# Altium PCB MB1075.PcbDoc (part 4 of 4)
Units mm, origin at the board's own origin, x right, y up, seen from the top; angles counter-clockwise.
Board outline 66 x 119.3 mm, 4 copper layers (TOP, L2, L3, Bottom), stack 1.548 mm thick; 196 components, 219 nets, 897 pads, 500 vias.
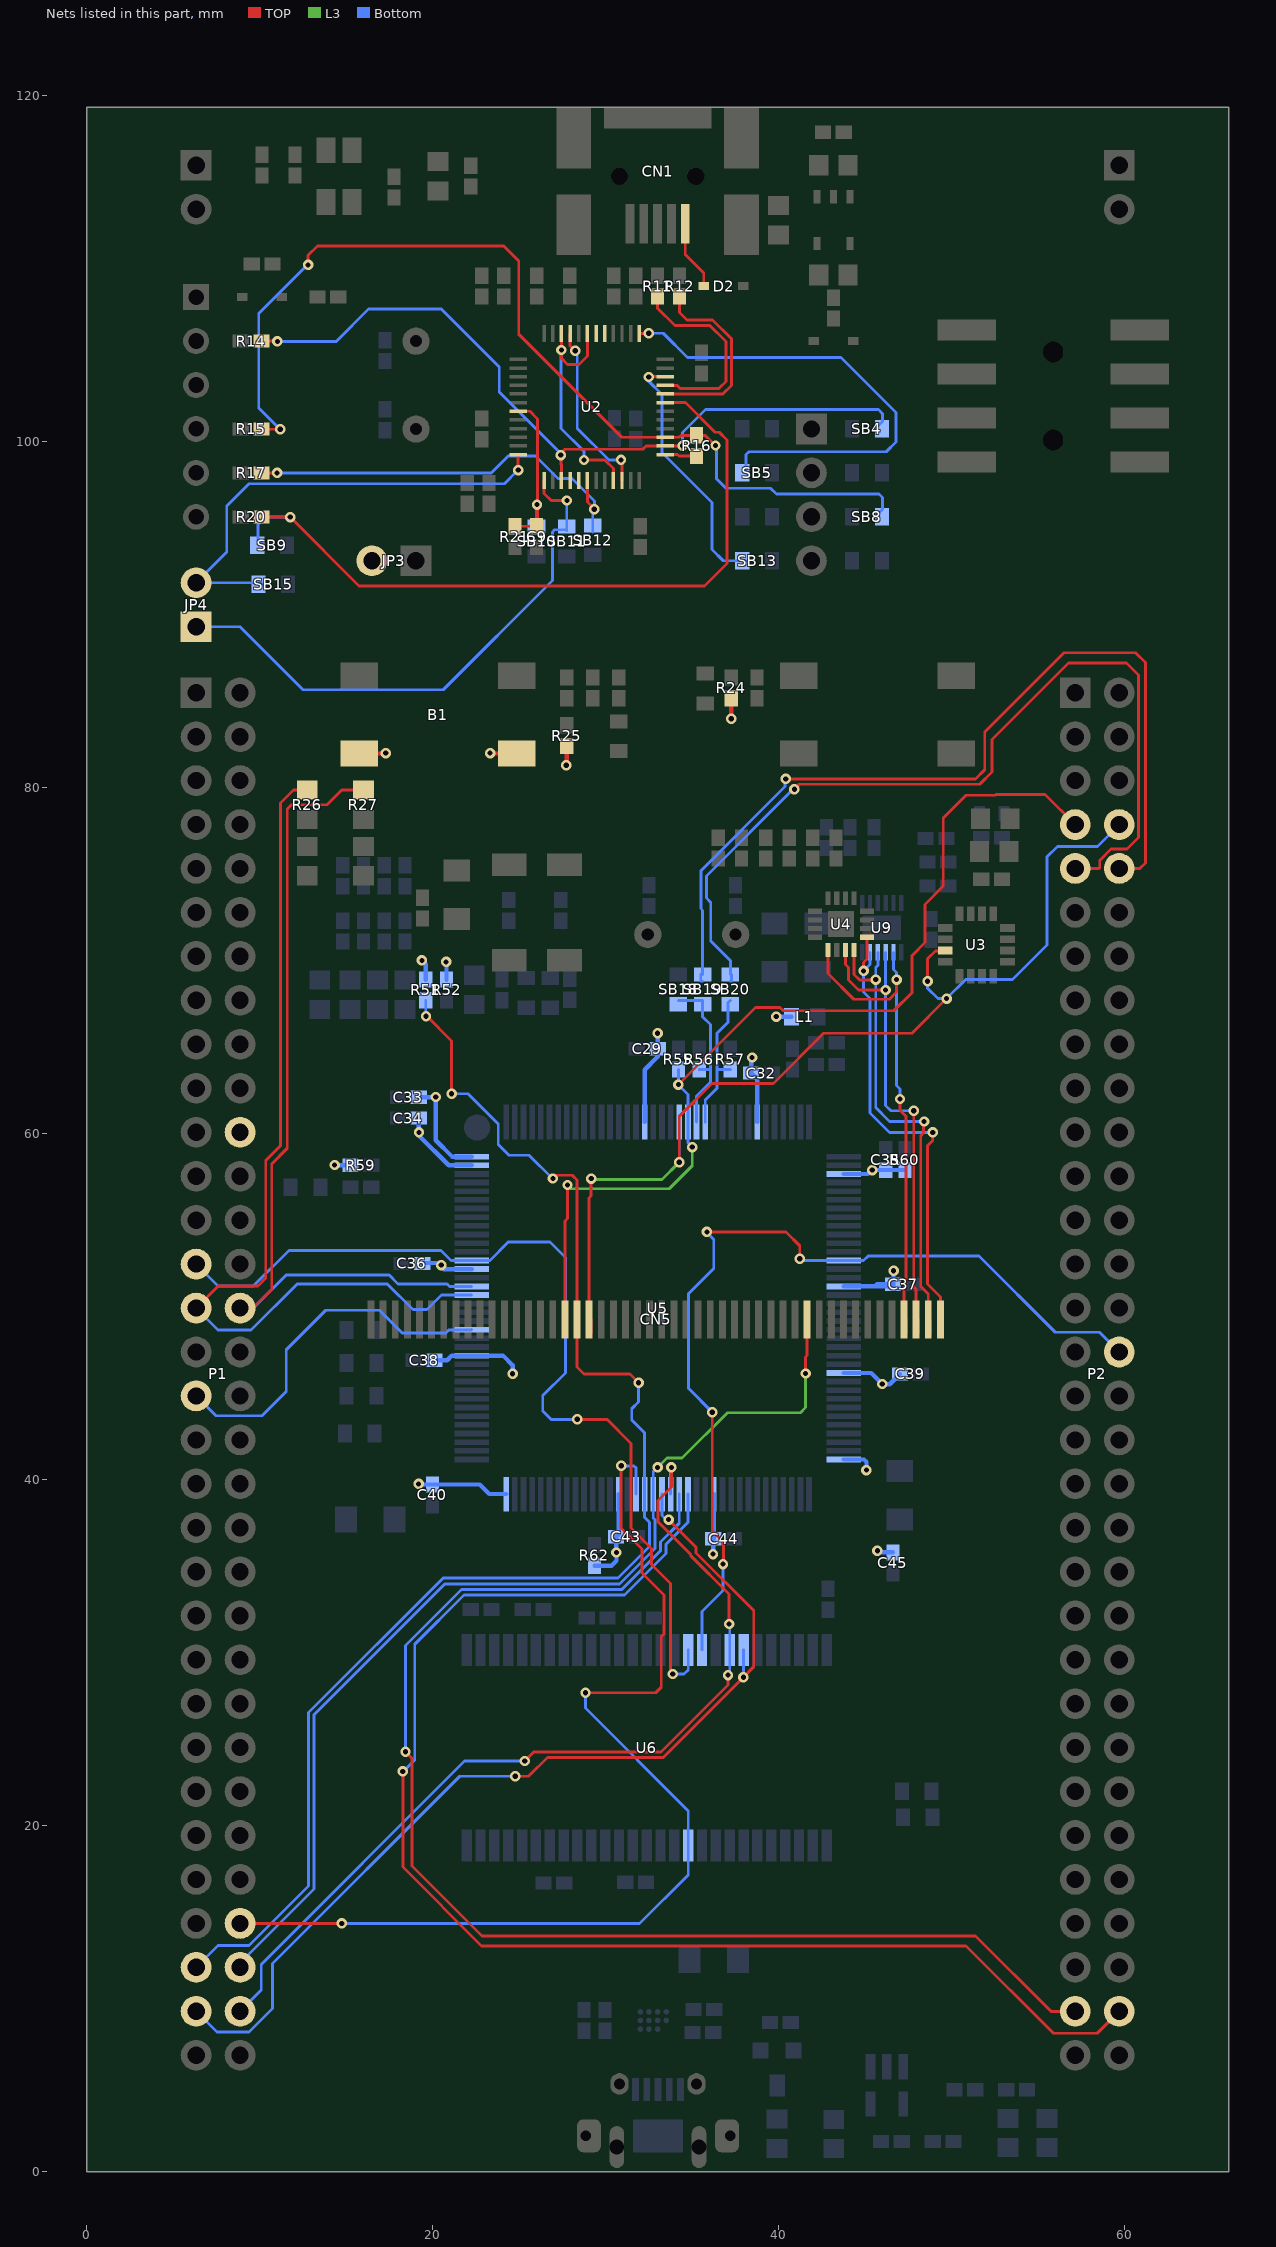
[diagram p5: the nets of this part, all layers, seen from the top]

## Via types
v1: diameter 0.6, hole 0.3, TOP to Bottom, 375 vias
v2: diameter 0.6, hole 0.3, TOP to Bottom, tented both sides, 125 vias

## Nets (pads, with @x,y where several pads share a name; then routed paths per layer and width w, separated by ;. In a path a pad name is that pad's centre, name@x,y a point inside that pad or via, vN(x,y) a via of type N, cw(c..) or ccw(c..) an arc to the next point about the centre after c; other vN are vias at no path point) (continued)
PF9: CN5.30 P2.8 U3.3 U5.21 | length 59.2
  TOP w0.165: CN5.30@29.039,49.256 29.039,56.269 29.158,56.388 v1(29.158,57.4) ; CN5.30@29.15,48.43 29.158,48.43 CN5.30@29.158,49.256 ; v1(34.252,58.346) 34.252,61.002 36.15,62.9 39.687,62.9 42.587,65.8 47.7,65.8 v1(49.7,67.8) ; v1(48.6,68.8) 48.6,70.1 49.05,70.55 U3.3@49.615,70.55
  L3 w0.165: v1(29.158,57.4) 29.158,57.354 33.26,57.354 v1(34.252,58.346)
  Bottom w0.165: U5.21@34.25,60.67 34.25,58.346 v1(34.252,58.346) ; v1(48.6,68.8) 48.6,68.4 49.2,67.8 v1(49.7,67.8) 50.8,68.9 53.5,68.9 55.5,70.9 55.5,76 56.1,76.6 58.41,76.6 P2.8@59.67,77.86
PF10: CN5.32 P2.7 R55.1 U5.22 | length 58.7
  TOP w0.165: CN5.32@27.639,49.256 27.639,54.939 27.793,55.093 v1(27.793,57.032) ; 35.3,63.933 v1(34.2,62.833) 38.66,67.293 40.078,67.293 40.271,67.1 46.646,67.1 47.708,68.162 47.708,70.297 48.448,71.036 48.448,73.248 49.5,74.3 49.5,78.245 50.81,79.555 52.5,79.555 52.546,79.6 55.39,79.6 P2.7@57.13,77.86
  L3 w0.165: v1(27.793,57.032) 28.011,56.814 33.674,56.814 35.001,58.141 v1(35.001,59.219)
  Bottom w0.165: R55.1@34.2,63.7 v1(34.2,62.833) 34.2,62.817 34.75,62.267 U5.22@34.75,60.67 34.75,59.47 v1(35.001,59.219)
PF11: P2.32 U5.49 U6.18 | length 54
  TOP w0.165: v1(35.845,54.323) 40.408,54.323 41.211,53.52 v1(41.211,52.769) ; v1(36.154,43.902) 36.154,37.053 36.807,36.4 36.807,35.296 36.982,35.121 v1(36.779,35.121)
  Bottom w0.165: U6.18@35.565,30.17 35.565,32.382 36.779,33.596 v1(36.779,35.121) ; v1(35.845,54.323) 35.845,54.277 36.239,53.883 36.239,52.214 34.775,50.75 34.775,45.281 v1(36.154,43.902) ; v1(41.211,52.769) 41.211,52.67 U5.49@43.75,52.67 44.902,52.67 45.168,52.936 51.566,52.936 55.979,48.523 58.527,48.523 P2.32@59.67,47.38
PG2: P2.62 U5.87 | length 79.7
  TOP w0.165: v1(18.276,23.147) 18.276,17.611 22.83,13.057 50.824,13.057 55.871,8.01 58.4,8.01 P2.62@59.67,9.28
  Bottom w0.165: v1(18.276,23.147) 18.302,23.147 18.962,23.807 18.962,30.492 21.815,33.345 31.083,33.345 33.476,35.739 33.476,36.268 34.75,37.541 U5.87@34.75,39.17
PG3: P2.61 U5.88 | length 75.4
  TOP w0.165: v1(18.428,24.282) 18.809,23.902 18.809,17.672 22.851,13.63 51.372,13.63 55.723,9.28 P2.61@57.13,9.28
  Bottom w0.165: v1(18.428,24.282) 18.428,30.427 21.662,33.661 30.927,33.661 33.159,35.893 33.159,36.396 34.25,37.487 U5.88@34.25,39.17
PG4: P1.62 U5.89 U6.20 | length 53.2
  TOP w0.165: v1(25.317,23.743) 25.842,24.268 33.191,24.268 37.064,28.141 v1(37.064,28.711) ; v1(33.794,40.712) 33.794,39.581 33.011,38.798 33.011,37.567 34.909,35.669 34.909,35.605 37.128,33.387 v1(37.128,31.664)
  Bottom w0.165: P1.62@8.87,9.28 10.093,10.503 10.093,11.993 21.843,23.743 v1(25.317,23.743) ; U5.89@33.75,39.17 33.75,40.712 v1(33.794,40.712) ; v1(37.064,28.711) 37.165,28.711 U6.20@37.165,30.17 37.165,31.664 v1(37.128,31.664)
PG5: P1.61 U5.90 U6.21 | length 56.9
  TOP w0.165: v1(24.77,22.865) 25.541,22.865 26.628,23.952 33.321,23.952 v1(37.953,28.584) 38.556,29.187 38.556,32.436 35.225,35.768 35.225,36.098 33.635,37.688 v1(33.635,37.696)
  Bottom w0.165: P1.61@6.33,9.28 7.531,8.079 9.38,8.079 10.736,9.436 10.736,12.036 21.565,22.865 v1(24.77,22.865) ; U5.90@33.25,39.17 33.25,37.922 33.476,37.696 v1(33.635,37.696) ; v1(37.953,28.584) 37.965,28.584 U6.21@37.965,30.17
PG6: CN5.12 P1.60 U5.91 | length 60
  TOP w0.165: v1(41.552,46.136) 41.542,46.146 41.542,47.079 41.639,47.176 CN5.12@41.639,49.256
  L3 w0.165: v1(33,40.712) 33.537,41.25 34.409,41.25 37.028,43.869 41.255,43.869 41.552,44.166 v1(41.552,46.136)
  Bottom w0.165: P1.60@8.87,11.82 8.87,12.07 13.147,16.347 13.147,26.422 20.701,33.976 30.796,33.976 32.841,36.021 32.841,37.696 32.75,37.788 32.75,40.462 v1(33,40.712)
PG7: CN5.31 P1.59 R51.1 U5.92 | length 83.2
  TOP w0.165: v1(19.615,66.78) 19.673,66.78 21.094,65.359 v1(21.094,62.302) ; v1(26.949,57.403) 27.143,57.596 28.067,57.596 28.339,57.324 CN5.31@28.339,49.256 28.339,46.511 28.75,46.1 31.4,46.1 v1(31.9,45.6)
  Bottom w0.165: P1.59@6.33,11.82 7.6,13.09 9.39,13.09 12.832,16.532 12.832,26.553 20.609,34.33 30.704,34.33 32.524,36.149 32.524,37.537 32.25,37.811 U5.92@32.25,39.17 32.25,42.7 31.5,43.45 31.5,44.1 31.9,44.5 v1(31.9,45.6) ; R51.1@19.6,67.7 19.6,66.78 v1(19.615,66.78) ; v1(21.094,62.302) 22.046,62.302 23.793,60.556 23.793,59.364 24.407,58.75 25.571,58.75 26.918,57.403 v1(26.949,57.403)
PG8: P1.58 U5.93 U6.38 | length 60.9
  TOP w0.165: P1.58@8.87,14.36 v1(14.744,14.36) ; v1(28.829,27.687) 32.887,27.687 33.204,28.004 33.204,30.94 33.358,31.093 33.358,33.346 32.1,34.604 32.1,36 30.892,37.208 v1(30.892,40.801)
  Bottom w0.165: v1(14.744,14.36) 31.96,14.36 34.765,17.165 U6.38@34.765,18.87 34.765,20.864 28.829,26.8 v1(28.829,27.687) ; v1(30.892,40.801) 31.641,40.801 31.75,40.692 U5.93@31.75,39.17
PG9: P1.33 U5.124 | length 21
  Bottom w0.165: P1.33@6.33,44.84 7.473,43.697 10.14,43.697 11.537,45.094 11.537,47.507 13.823,49.793 16.933,49.793 18.241,48.486 18.428,48.486 20.763,48.485 20.927,48.65 22.23,48.65 U5.124@22.25,48.67
PG13: P1.29 R26.1 U5.128 | length 52.9
  TOP w0.165: P1.29@6.33,49.92 7.61,51.2 9.9,51.2 10.35,51.65 10.35,58.45 11.2,59.3 11.2,79.1 11.95,79.85 R26.1@12.75,79.85
  Bottom w0.165: P1.29@6.33,49.92 7.6,48.65 9.505,48.65 12.172,51.317 17.379,51.317 18.867,49.829 19.673,49.829 20.514,50.67 U5.128@22.25,50.67
PG14: P1.30 R27.1 U5.129 | length 49.7
  TOP w0.165: P1.30@8.87,49.92 9.62,49.92 10.7,51 10.7,58.25 11.6,59.15 11.6,78.75 11.85,79 13.9,79 14.75,79.85 R27.1@16,79.85
  Bottom w0.165: P1.30@8.87,49.92 9.632,49.92 11.537,51.825 17.486,51.825 18.002,51.309 20.837,51.309 20.976,51.17 U5.129@22.25,51.17
PG15: P1.27 U5.132 U6.17 | length 55.5
  TOP w0.165: v1(28.358,43.489) 30.076,43.489 31.469,42.096 31.469,37.2 32.644,36.026 32.644,35.1 33.746,33.998 33.746,28.897 v1(33.868,28.775)
  Bottom w0.165: P1.27@6.33,52.46 7.6,51.19 9.632,51.19 11.689,53.247 20.476,53.247 21.053,52.67 U5.132@22.25,52.67 23.304,52.67 24.364,53.73 26.777,53.73 27.666,52.841 27.666,46.171 26.364,44.869 26.364,43.966 26.84,43.489 v1(28.358,43.489) ; v1(33.868,28.775) 34.527,28.775 34.765,29.012 U6.17@34.765,30.17
PH0: P2.10 SB19.1 | length 52.4
  TOP w0.165: v1(40.4,80.5) 51.374,80.5 51.9,81.026 51.9,83.2 56.485,87.785 60.615,87.785 61.185,87.215 61.185,75.645 60.86,75.32 P2.10@59.67,75.32
  Bottom w0.165: SB19.1@35.488,69.189 35.488,68.8 SB19.1@35.6,68.8 ; SB19.1@35.6,69.189 35.6,72.898 35.499,72.999 35.499,75.187 40.367,80.055 40.367,80.467 v1(40.4,80.5)
PH0-OSC_IN: R56.1 SB18.2 SB19.2 U5.23 | length 9.6
  Bottom w0.165: SB18.2@34.2,67.7 35.6,67.7 35.6,66.751 36.048,66.303 36.048,63.7 ; U5.23@35.25,60.67 35.25,62.171 36.048,62.969 36.048,63.7 ; R56.1@35.4,63.7 36.048,63.7
PH1: P2.9 SB20.1 | length 52.3
  TOP w0.165: v1(40.9,79.9) 41.185,80.185 51.61,80.185 52.324,80.899 52.324,82.781 56.743,87.2 60.1,87.2 60.792,86.508 60.792,77.104 60.129,76.442 59.205,76.442 58.548,75.785 58.548,75.364 58.504,75.32 P2.9@57.13,75.32
  Bottom w0.165: SB20.1@37.2,68.8 37.274,68.8 SB20.1@37.274,69.189 ; SB20.1@37.2,69.189 37.2,70.002 36.068,71.134 36.068,73.364 35.814,73.618 35.814,74.895 40.819,79.9 v1(40.9,79.9)
PH1-OSC_OUT: R57.1 SB20.2 U5.24 | length 8.4
  Bottom w0.165: U5.24@35.75,60.67 35.75,61.941 36.429,62.62 36.429,63.7 ; R57.1@37.2,63.7 36.429,63.7 ; SB20.2@37.2,67.7 37.064,67.564 37.064,66.43 36.429,65.795 36.429,63.7
STLINK_RX: JP4.1 SB11.2 U2.13 | length 32.4
  TOP w0.165: U2.13@26.44,97.74 26.44,96.997 26.85,96.587 v1(27.758,96.587)
  Bottom w0.165: JP4.1@6.33,89.29 8.86,89.29 12.5,85.65 20.608,85.65 26.925,91.967 26.925,94.77 27.048,94.893 SB11.2@27.75,94.893 ; SB11.2@27.75,94.85 SB11.2@27.75,94.893 ; v1(27.758,96.587) 27.75,96.587 SB11.2@27.75,94.893
STLINK_TX: JP4.2 SB15.2 U2.12 | length 27.6
  TOP w0.165: v1(24.94,98.341) U2.12@24.94,99.24
  Bottom w0.165: SB15.2@10.15,91.75 10.07,91.83 JP4.2@6.33,91.83 8.1,93.6 8.1,96.26 9.396,97.555 24.154,97.555 v1(24.94,98.341)
STM_JTCK: SB5.2 U2.37 | length 28.5
  TOP w0.165: U2.37@31.94,106.24 32.491,106.24 v1(32.491,106.246)
  Bottom w0.165: v1(32.491,106.246) 33.322,106.246 34.722,104.846 43.604,104.846 46.78,101.67 46.78,99.969 46.211,99.4 38.278,99.4 38.115,99.237 SB5.2@38.115,98.18
STM_JTMS: SB13.2 U2.34 | length 14.7
  TOP w0.165: v1(32.49,103.722) 32.49,103.74 v1@32.671,103.74 ; v1@32.671,103.74 U2.34@33.44,103.74
  Bottom w0.165: v1(32.49,103.722) 32.49,103.473 33.252,102.711 33.252,99.363 36.144,96.47 36.144,93.744 36.788,93.1 SB13.2@38.115,93.1
STM_RST: C9.2 R21.1 SB10.2 U2.7 | length 13.1
  TOP w0.165: R21.1@24.75,95.1 C9.2@26,95.1 26,96.317 v1(26.03,96.347) 26.03,94.97 26.015,94.97 26.065,95.02 26.065,101.293 25.618,101.74 U2.7@24.94,101.74
  Bottom w0.165: SB10.2@26,94.85 26,96.347 v1(26.03,96.347)
SWIM: U2.22 U2.45 | length 10.7
  TOP w0.165: U2.45@27.94,106.24 27.94,105.528 28.37,105.098 28.37,105.24 v1(28.233,105.24) ; v1(30.884,98.93) 30.94,98.874 U2.22@30.94,97.74
  Bottom w0.165: v1(28.233,105.24) 28.357,105.24 28.357,100.755 30.181,98.93 v1(30.884,98.93)
SWIM_IN: U2.21 U2.43 U2.46 | length 14.1
  TOP w0.165: U2.46@27.44,106.24 v1(27.44,105.278) 27.44,104.806 27.797,104.449 28.46,104.449 28.94,104.929 U2.43@28.94,106.24 ; v1(28.745,98.922) 29.943,98.922 30.44,98.426 U2.21@30.44,97.74
  Bottom w0.165: v1(27.44,105.278) 27.42,105.278 27.42,100.753 28.745,99.428 v1(28.745,98.922)
SWIM_RST: U2.42
SWIM_RST_IN: U2.41
T_JTCK: R14.2 SB4.1 U2.15 U2.26 | length 45.5
  TOP w0.165: R14.2@10.105,105.8 11.025,105.8 v1(11.025,105.781) ; U2.15@27.44,97.74 27.44,98.666 27.405,98.701 v1(27.405,99.209) 27.3,99.209 27.331,99.24 27.337,99.24 27.644,99.547 32.138,99.547 32.331,99.74 U2.26@33.44,99.74 34.437,99.74 v1(34.437,99.747)
  Bottom w0.165: v1(11.025,105.781) 14.431,105.781 16.3,107.65 20.5,107.65 23.85,104.3 23.85,102.85 27.405,99.295 v1(27.405,99.209) ; v1(34.437,99.747) 34.437,100.515 35.764,101.842 45.758,101.842 46,101.6 46,101.155 SB4.1@45.565,100.72
T_JTDI: U2.17
T_JTDO: U2.16
T_JTMS: R15.2 R16.2 SB8.1 U2.27 | length 57.4
  TOP w0.165: R15.2@10.105,100.72 10.105,100.7 v1(11.186,100.7) ; v1(12.8,110.2) 12.8,110.752 13.337,111.288 24.108,111.288 24.971,110.426 24.971,106.192 30.923,100.24 U2.27@33.44,100.24 34.231,100.24 34.341,100.35 R16.2@35.25,100.35 35.754,100.35 v1(36.341,99.763)
  Bottom w0.165: v1(11.186,100.7) 9.95,101.937 9.95,107.4 12.75,110.2 v1(12.8,110.2) ; v1(36.341,99.763) 36.341,99.832 36.395,99.778 36.395,97.843 36.95,97.288 39.529,97.288 39.867,96.951 45.799,96.951 46,96.75 46,96.075 SB8.1@45.565,95.64
T_NRST: R17.2 SB12.1 U2.18 | length 24.4
  TOP w0.165: R17.2@10.105,98.18 v1(11.008,98.18) ; U2.18@28.94,97.74 28.94,96.5 29.36,96.08 v1(29.342,96.08)
  Bottom w0.165: v1(11.008,98.18) 23.387,98.18 24.37,99.163 25.937,99.163 27.25,97.85 28.05,97.85 29.342,96.558 v1(29.342,96.08) 29.342,95.892 29.25,95.8 SB12.1@29.25,94.75
T_SWDIO_IN: R16.1 U2.25 | length 1.8
  TOP w0.165: U2.25@33.44,99.24 34.145,99.24 34.235,99.15 R16.1@35.25,99.15
T_SWO: R20.2 SB9.1 U2.31 | length 44.1
  TOP w0.165: R20.2@10.105,95.64 10.122,95.623 v1(11.773,95.623) 15.746,91.649 35.713,91.649 37.012,92.948 37.012,100.078 36.562,100.528 36.315,100.528 34.603,102.24 U2.31@33.44,102.24
  Bottom w0.165: SB9.1@10.25,94 9.9,94.35 9.9,95.2 10.323,95.623 v1(11.773,95.623)
U5V: CN1.1 D2.1 | length 4
  TOP w0.165: CN1.1@34.597,112.575 34.597,110.802 35.667,109.732 D2.1@35.667,108.975
USB_DM: R12.2 U2.32 | length 11.3
  TOP w0.165: U2.32@33.44,102.74 36.766,102.74 37.26,103.233 37.26,105.929 36.177,107.012 34.697,107.012 34.27,107.439 R12.2@34.27,108.375
USB_DP: R11.2 U2.33 | length 11.5
  TOP w0.165: R11.2@33,108.375 33,107.69 33.994,106.696 36.014,106.696 36.944,105.766 36.944,103.466 36.534,103.056 34.31,103.056 34.125,103.24 U2.33@33.44,103.24
VDD: B1.1 B1.4 C29.2 C32.2 C33.2 C34.2 C35.2 C36.2 C37.2 C38.2 C39.2 C40.2 C43.2 C44.2 C45.2 JP3.2 L1.1 P1.22 R24.2 R25.2 R51.2 R52.2 R59.1 R60.2 R62.2 U5.17 U5.30 U5.39 U5.52 U5.62 U5.72 U5.84 U5.95 U5.108 U5.121 U5.131 U5.143 U5.144 | length 67.7
  TOP w0.25: B1.4@15.75,81.96 17.284,81.96 v1(17.284,81.987) ; v1(23.316,81.987) 23.316,81.96 B1.1@24.85,81.96 ; v1(27.724,81.29) 27.75,81.29 R25.2@27.75,82.4 ; v1(37.248,83.973) 37.25,83.973 R24.2@37.25,85.15
  Bottom w0.25: v1(14.335,58.184) 14.335,58.175 R59.1@15.255,58.175 ; v1(19.189,39.76) 19.189,39.725 C40.2@19.983,39.725 22.716,39.725 23.271,39.17 U5.108@24.25,39.17 ; v1@19.2,60.069 19.2,59.897 20.927,58.17 U5.143@22.25,58.17 ; C34.2@19.2,60.9 19.2,60.069 v1(19.211,60.069) ; C33.2@19.2,62.1 v1@20.173,62.1 ; v1(19.375,70.009) 19.6,69.784 R51.2@19.6,68.9 ; C36.2@19.4,52.5 19.422,52.522 20.3,52.522 20.653,52.17 20.8,52.17 ; C38.2@20.106,46.904 20.84,46.904 21.106,47.17 U5.121@22.25,47.17 24.066,47.17 24.618,46.618 v1(24.618,46.119) ; v1(20.173,62.112) v1@20.173,62.1 ; v1(20.5,52.4) 20.73,52.17 20.8,52.17 ; v1(20.776,69.922) 20.8,69.922 R52.2@20.8,68.9 ; U5.131@22.25,52.17 20.8,52.17 ; U5.144@22.25,58.67 21.123,58.67 20.173,59.62 v1@20.173,62.1 ; R62.2@29.349,35.032 30.336,35.033 30.619,35.315 v1(30.619,35.791) 30.6,35.791 C43.2@30.6,36.7 30.75,36.85 U5.95@30.75,39.17 ; U5.17@32.25,60.67 32.25,63.689 33,64.439 C29.2@33,64.9 v1(33,65.795) ; v1(36.2,35.7) 36.21,35.7 C44.2@36.21,36.585 36.25,36.585 U5.84@36.25,39.17 ; v1(38.461,64.398) 38.4,64.398 C32.2@38.4,63.5 38.412,63.5 38.75,63.162 U5.30@38.75,60.67 ; v1(39.858,66.76) 39.825,66.76 39.835,66.75 L1.1@40.738,66.75 ; U5.72@43.75,41.17 44.925,41.17 45.065,41.03 v1(45.065,40.554) ; U5.62@43.75,46.17 45.339,46.17 v1(45.979,45.53) 45.979,45.52 46.415,45.52 C39.2@47.005,46.11 ; U5.52@43.75,51.17 45.541,51.17 ; U5.39@43.75,57.67 45.145,57.67 45.367,57.893 v1(45.4,57.893) C35.2@46.176,57.892 R60.2@47.288,57.892 ; v1(45.7,35.9) 45.7,35.8 C45.2@46.6,35.8 ; C37.2@46.6,51.3 45.671,51.3 45.541,51.17 ; v1(46.633,52.072) 46.633,51.17 45.541,51.17
XL: CN5.2 U4.16 U9.4 | length 27.5
  TOP w0.165: U4.16@44.35,70.6 44.35,69.197 44.679,68.867 45.567,68.867 v1(45.6,68.9) ; v1(48.4,60.701) 48.367,60.668 48.367,60.026 48.205,59.863 48.205,51.162 48.639,50.728 CN5.2@48.639,49.256 ; CN5.2@48.75,48.43 CN5.2@48.75,49.256
  Bottom w0.165: U9.4@45.725,70.475 45.725,69.725 45.6,69.6 45.6,61.5 46.399,60.701 v1(48.4,60.701)
XR: CN5.4 U4.13 U9.2 | length 29.2
  TOP w0.165: U4.13@42.85,70.6 42.85,69.25 44.333,67.767 46.396,67.767 46.811,68.183 v1(46.811,68.9) ; v1(47.005,62) 47.005,61.345 47.35,61 47.35,51.283 47.239,51.172 CN5.4@47.239,49.256 ; CN5.4@47.35,48.43 CN5.4@47.35,49.256
  Bottom w0.165: U9.2@46.625,70.475 46.625,69.486 46.811,69.3 v1(46.811,68.9) 46.811,62.774 47.005,62.58 v1(47.005,62)
YD: CN5.1 U4.1 U9.5 | length 27.8
  TOP w0.165: v1(44.9,69.4) 44.9,69.889 45.1,70.089 U4.1@45.1,71.35 ; v1(48.9,60.069) 48.9,59.6 48.6,59.3 48.6,51.3 49.339,50.561 CN5.1@49.339,49.256 ; CN5.1@49.45,48.43 CN5.1@49.45,49.256
  Bottom w0.165: U9.5@45.275,70.475 45.275,69.775 v1(44.9,69.4) 44.9,68.175 45.275,67.8 45.275,61.183 46.4,60.058 48.89,60.058 v1(48.9,60.069)
YU: CN5.3 U4.15 U9.3 | length 27.7
  TOP w0.165: U4.15@43.85,70.6 43.85,69.776 44.033,69.594 44.033,68.867 44.6,68.3 v1(46.175,68.3) ; v1(47.8,61.323) 47.8,51.121 47.939,50.982 CN5.3@47.939,49.256 ; CN5.3@48.05,48.43 CN5.3@48.05,49.256
  Bottom w0.165: U9.3@46.175,70.475 v1(46.175,68.3) 46.175,61.625 46.477,61.323 v1(47.8,61.323)
pads on no net: CN1.11 CN1.12 CN3.2 CN3.6 CN3.9 CN3.10 CN5.9 CN5.10 CN6.11 CN6.12 P2.4 U2.4 U2.11 U2.14 U2.19 U2.28 U2.38 U2.39 U2.40 U4.17 U5.145 U6.36 U6.40 U7.A2 U7.B1 U7.B2 U7.C2 X2.2 X2.3

## Polygon pours and split planes (outlines as drawn)
3V on L3 "L3_3V_P013" (solid, remove dead copper, pour order 13): 10,119.3 66,119.3 66,1 0,1 0,119.3
VDD on L3 "L3_VDD_P012" (solid, remove dead copper, pour order 12): 18.186,84 18.186,96 11,96 11,79.8 20.4,79.8 20.4,71.902 19.2,71.902 19.2,63.5 7.6,63.5 7.6,56.6 13.93,56.6 13.93,52.2 20.5,52.2 20.5,47.7 14.1,47.7 14.1,37.6 21.6,37.6 21.6,34.9 49.202,34.9 49.202,44.293 46.565,44.293 46.565,46.384 44.5,46.384 44.5,50.8 50,50.8 50,67.75 39.5,67.75 39.5,84
GND on L2 "L2_GND_P011" (solid, remove dead copper, pour order 11): 0,0 66,0 66,119.3 0,119.3
GND on Bottom "BOTTOM_GND_P014" (solid, remove dead copper, pour order 14): 0,0 66,0 66,119.3 0,119.3
GND on TOP "TOP_GND_P010" (solid, remove dead copper, pour order 10): 0,0 66,0 66,119.3 0,119.3

## Keep-outs
TOP:
  circle w0.2: c53.6,65.63 r0.78
  rectangle: 53.067,72.019 53.397,72.217
  rectangle: 53.072,69.533 53.392,69.729
L2:
  circle w0.2: c53.6,65.63 r0.88
  circle w0.2: c53.6,6.93 r0.88
  circle w0.2: c12.4,6.93 r0.88
L3:
  circle w0.2: c53.6,65.63 r0.78
  circle w0.2: c53.6,6.93 r0.78
  circle w0.2: c12.4,6.93 r0.78
  region: 10.487,96.514 10.487,79.239 19.887,79.239 19.887,72.389 18.587,72.389 18.587,64.114 6.987,64.114 6.987,55.889 13.237,55.889 13.237,51.589 19.687,51.589 19.687,48.264 13.487,48.264 13.487,36.989 20.987,36.989 20.986,34.389 49.787,34.389 49.787,44.849 47.087,44.849 47.087,46.974 45.012,46.974 45.012,50.289 50.612,50.289 50.612,68.409 40.212,68.409 40.212,84.709 18.762,84.709 18.762,96.514 11.012,96.514 11.012,95.989 18.172,95.989 18.172,83.987 39.487,83.987 39.487,67.739 49.987,67.739 49.987,50.814 44.487,50.814 44.487,46.369 46.552,46.369 46.552,44.279 49.192,44.279 49.192,34.914 21.612,34.914 21.612,37.614 14.112,37.614 14.112,47.689 20.512,47.689 20.512,52.214 13.942,52.214 13.942,56.614 7.612,56.614 7.612,63.489 18.587,63.489 19.212,63.489 19.212,71.889 20.412,71.889 20.412,79.814 11.012,79.814 11.012,96.514
Bottom:
  circle w0.2: c53.6,65.63 r0.78
  rectangle: 38.215,96.14 39.32,96.357
  rectangle: 38.215,94.923 39.32,95.14
  rectangle: 47.802,78.439 47.997,78.475
  region: 26.498,93.932 26.498,93.003 26.097,93.001 26.097,92.769 26.498,92.77 26.669,92.84 26.717,92.956 26.714,93.935
  region: 25.498,93.848 25.498,93.003 25.899,93.001 25.899,92.769 25.498,92.77 25.343,92.834 25.279,92.987 25.282,93.851
  region: 38.019,95.14 37.465,95.14 37.462,95.541 37.302,95.541 37.303,95.14 37.373,94.969 37.49,94.921 38.022,94.923
  region: 38.019,96.14 37.465,96.14 37.462,95.739 37.302,95.739 37.303,96.14 37.367,96.295 37.52,96.359 38.021,96.357
Keep-Out Layer:
  the board outline again, w0.254

## Other copper
TOP:
  text "TOP LAYER" at -20,-69.5 h2.45
L2:
  text "INNER LAYER 2" at -20,-69.5 h2.45
L3:
  text "INNER LAYER 3" at -20,-69.5 h2.45
Bottom:
  text "BOTTOM LAYER" at -20,-69.5 h2.45

## Silkscreen, mask and mechanical layers (free items; w line width, h text height)
Top Silk:
  region: 43.795,92.465 45.065,92.465 45.065,96.275 43.795,96.275
  region: 43.795,97.545 45.065,97.545 45.065,101.355 43.795,101.355
  region: 24.11,105.3 cw(c24.11,105.8) 24.11,106.3 cw(c24.11,105.8)
  region: 4.044,84.853 cw(c4.044,85.353) 4.044,85.853 cw(c4.044,85.353)
  region: 3.536,108.094 cw(c3.536,108.594) 3.536,109.094 cw(c3.536,108.594)
  region: 48.24,98.315 cw(c48.24,98.815) 48.24,99.315 cw(c48.24,98.815)
  region: 54.844,84.98 cw(c54.844,85.48) 54.844,85.98 cw(c54.844,85.48)
  region: 29.19,68.153 cw(c29.19,68.652) 29.19,69.153 cw(c29.19,68.652)
  lines w0.127: 14.478,49.276 15.154,49.276 ; 50.609,49.26 51.399,49.26
  lines w0.203: 28.067,0.127 37.916,0.127 37.916,4.191 28.067,4.191 28.067,0.127
  lines w0.508: 38.715,92.465 39.985,92.465 39.985,96.275 38.715,96.275 38.715,92.465 ; 38.715,97.545 39.985,97.545 39.985,101.355 38.715,101.355 38.715,97.545 ; 43.795,92.465 43.795,96.275 45.065,96.275 45.065,92.465 43.795,92.465 ; 43.795,97.545 43.795,101.355 45.065,101.355 45.065,97.545 43.795,97.545
  text "GND" at 4.425,113.42 h2 r90
  text "GND" at 62.627,113.109 h2 r90
  text "COM" at 12.998,111.578 h2
  text "PWR" at 18.713,111.578 h2
  text "J" at 48.7,111.5 h12
  text "USB ST-LINK" at 26.333,110.88 h2 r90
  text "SWD" at 4.2,100.6 h2 r90
  text "ldd" at 16.49,95.005 h2
  text "ST-LINK" at 37.727,94.459 h2 r90
  text "DISCOVERY" at 47.027,93.109 h2 r90
  text "MB1075E" at 49.227,92.209 h3
  text "TX" at 1.25,91.08 h2
  text "www.st.com/stm32f4-discovery" at 14.128,88.75 h3.7
  text "RX" at 1.25,88.54 h2
  text "5V" at 1.25,84.73 h2
  text "3V" at 61.575,84.73 h2
  text "PF4" at 1.25,82.19 h2
  text "NC" at 61.575,82.19 h2
  text "PF7" at 61.707,79.698 h2
  text "PF2" at 1.25,79.65 h2
  text "RESET" at 44.077,79.309 h2
  text "USER" at 19.03,78.812 h2
  text "STM32F429I-DISC1" at 22.479,77.699 h2.7
  text "PF0" at 1.25,77.11 h2
  text "PF9" at 61.575,77.11 h2
  text "PC14" at 1.25,74.57 h2
  text "PH0" at 61.575,74.57 h2
  text "PE6" at 1.25,72.03 h2
  text "NRST" at 61.575,72.03 h2
  text "PG14" at 17.05,69.65 h2 r90
  text "PG13" at 13.792,69.596 h2 r90
  text "PE4" at 1.25,69.49 h2
  text "PC0" at 61.575,69.49 h2
  text "PE2" at 1.25,66.95 h2
  text "PC2" at 61.575,66.945 h2
  text "PE0" at 1.25,64.41 h2
  text "PA0" at 61.575,64.41 h2
  text "PB8" at 1.25,61.87 h2
  text "PA2" at 61.468,61.829 h2
  text "BOOT0" at 0.298,59.33 h2
  text "PA4" at 61.575,59.32 h2
  text "PB6" at 1.25,56.79 h2
  text "PA6" at 61.575,56.78 h2
  text "PB4" at 1.25,54.25 h2
  text "PC4" at 61.575,54.25 h2
  text "PG15" at 1.25,51.71 h2
  text "PB0" at 61.575,51.71 h2
  text "PG13" at 1.25,49.17 h2
  text "PB2" at 61.575,49.16 h2
  text "PG11" at 1.25,46.63 h2
  text "PF11" at 61.575,46.63 h2
  text "PG9" at 1.25,44.09 h2
  text "PF13" at 61.575,44.09 h2
  text "PD7" at 1.25,41.55 h2
  text "PF15" at 61.575,41.545 h2
  text "PD5" at 1.25,39.01 h2
  text "PG1" at 61.575,39.005 h2
  text "PD3" at 1.25,36.47 h2
  text "PE8" at 61.575,36.47 h2
  text "PD1" at 1.25,33.93 h2
  text "PE10" at 61.575,33.93 h2
  text "PC12" at 1.25,31.39 h2
  text "PE12" at 61.575,31.39 h2
  text "PC10" at 1.25,28.85 h2
  text "PE14" at 61.575,28.85 h2
  text "PA14" at 1.25,26.31 h2
  text "PB10" at 61.575,26.31 h2
  text "PA12" at 1.25,23.77 h2
  text "PB12" at 61.575,23.77 h2
  text "PA10" at 1.25,21.23 h2
  text "PB14" at 61.575,21.23 h2
  text "PA8" at 1.25,18.69 h2
  text "PD8" at 61.575,18.69 h2
  text "PC8" at 1.25,16.15 h2
  text "PD10" at 61.575,16.15 h2
  text "PC6" at 1.25,13.61 h2
  text "PD12" at 61.575,13.61 h2
  text "PG7" at 1.25,11.07 h2
  text "PD14" at 61.575,11.07 h2
  text "PG5" at 1.25,8.53 h2
  text "PG2" at 61.575,8.53 h2
  text "GND" at 1.25,5.99 h2
  text "GND" at 61.575,5.99 h2
  text "CN6" at 25.377,4.559 h1.2
  text "USB USER" at 21.127,2.959 h2
  text "SILKSCREEN TOP LAYER" at -20.193,-69.596 h2.45
Bot Silk:
  region: 3.79,86.885 cw(c3.79,87.385) 3.79,87.885 cw(c3.79,87.385)
  region: 22.84,62.755 cw(c22.84,63.255) 22.84,63.755 cw(c22.84,63.255)
  region: 54.59,86.885 cw(c54.59,87.385) 54.59,87.885 cw(c54.59,87.385)
  region: 20.3,30.37 cw(c20.3,30.87) 20.3,31.37 cw(c20.3,30.87)
  region: 46.4,71.427 cw(c46.4,71.7) 46.4,71.973 cw(c46.4,71.7)
  region: 33.6,7.327 cw(c33.6,7.6) 33.6,7.873 cw(c33.6,7.6)
  region: 3.79,88.79 cw(c3.79,89.29) 3.79,89.79 cw(c3.79,89.29)
  region: 3.79,107.84 cw(c3.79,108.34) 3.79,108.84 cw(c3.79,108.34)
  region: 43.9,6.627 cw(c43.9,6.9) 43.9,7.173 cw(c43.9,6.9)
  region: 41.89,102.76 cw(c41.89,103.26) 41.89,103.76 cw(c41.89,103.26)
  region: 21.57,92.6 cw(c21.57,93.1) 21.57,93.6 cw(c21.57,93.1)
  region: 28.367,5.406 cw(c28.367,5.906) 28.367,6.406 cw(c28.367,5.906)
  lines w0.203: 37.128,91.512 40.303,91.512 40.303,102.625 37.128,102.625 37.128,91.512 ; 43.478,91.512 46.653,91.512 46.653,102.625 43.478,102.625 43.478,91.512
  lines w0.254: 5.061,88.021 7.601,88.021 7.601,93.101 5.061,93.101 5.061,88.021 ; 5.06,94.43 7.6,94.43 7.6,109.55 5.06,109.55 5.06,94.43 ; 15.219,91.831 20.299,91.831 20.299,94.371 15.219,94.371 15.219,91.831 ; 40.62,91.83 43.16,91.83 43.16,101.99 40.62,101.99 40.62,91.83
  text "JP2" at 56.777,114.009 h1.5 r270
  text "JP1" at 8.527,113.909 h1.5 r270
  text "GND" at 3.027,113.409 h2 r270
  text "GND" at 61.877,113.409 h2 r270
  text "CN2" at 8.235,100.72 h1.5 r270
  text "SWD" at 2.52,100.085 h2 r270
  text "ldd" at 18.395,95.005 h2
  text "DEFAULT" at 47.177,94.109 h2 r270
  text "RESERVED" at 35.677,93.609 h2 r270
  text "JP4" at 8.027,91.809 h1.5 r270
  text "TX" at 3.029,91.55 h2
  text "CN4" at 42.827,90.409 h1.5
  text "JP3" at 18.395,89.925 h1.5
  text "RX" at 2.994,89.01 h2
  text "P1" at 10.14,87.385 h1.5
  text "P2" at 53.7,87 h1.5
  text "5V" at 4.425,85.08 h2
  text "5V" at 12.511,85.08 h2
  text "3V" at 55.543,85.08 h2
  text "3V" at 64.75,85.08 h2
  text "PF6" at 55.5,82.94 h2
  text "PF4" at 4.425,82.54 h2
  text "PF5" at 12.921,82.54 h2
  text "NC" at 64.75,82.54 h2
  text "PF8" at 55.5,81.1 h2
  text "PF2" at 4.425,80 h2
  text "PF3" at 12.918,80 h2
  text "PF7" at 64.75,80 h2
  text "PF0" at 4.425,77.46 h2
  text "PF1" at 12.927,77.46 h2
  text "PF9" at 64.75,77.46 h2
  text "PF10" at 54.5,76.6 h2 r270
  text "PC14" at 4.425,74.92 h2
  text "PC15" at 13.634,74.92 h2
  text "PH0" at 64.75,74.92 h2
  text "PH1" at 54.3,74 h2 r270
  text "PE6" at 4.425,72.38 h2
  text "PC13" at 13.631,72.38 h2
  text "GND" at 55.543,72.38 h2
  text "NRST" at 64.75,72.38 h2
  text "PE4" at 4.425,69.84 h2
  text "PE5" at 12.956,69.84 h2
  text "PC1" at 55.543,69.84 h2
  text "PC0" at 64.75,69.84 h2
  text "PE2" at 4.425,67.3 h2
  text "PE3" at 12.636,67.3 h2
  text "PC2" at 64.75,67.3 h2
  text "PC3" at 55.543,66.983 h2
  text "PE0" at 4.425,64.76 h2
  text "PE1" at 12.961,64.76 h2
  text "PA0" at 64.75,64.443 h2
  text "PA1" at 55.543,63.808 h2
  text "PB8" at 4.425,62.22 h2
  text "PB9" at 13.032,62.22 h2
  text "PA3" at 55.543,61.903 h2
  text "PA2" at 64.75,61.903 h2
  text "BOOT0" at 4.743,59.68 h2
  text "VDD" at 13.405,59.68 h2
  text "PA5" at 55.543,59.68 h2
  text "PA4" at 64.75,59.363 h2
  text "PB7" at 13.039,57.775 h2
  text "PB6" at 4.425,57.14 h2
  text "PA7" at 55.543,57.14 h2
  text "PA6" at 64.75,56.823 h2
  text "PB4" at 4.425,54.6 h2
  text "PB5" at 13.024,54.6 h2
  text "PC5" at 55.543,54.6 h2
  text "PC4" at 64.75,54.283 h2
  text "PG15" at 4.425,52.06 h2
  text "PB3" at 13.021,52.06 h2
  text "PB1" at 55.543,52.06 h2
  text "PB0" at 64.75,51.743 h2
  text "PG13" at 4.448,49.52 h2
  text "PG14" at 13.789,49.52 h2
  text "GND" at 55.543,49.52 h2
  text "PB2" at 64.75,49.52 h2
  text "PG11" at 4.453,46.98 h2
  text "PG12" at 13.756,46.98 h2
  text "PF12" at 55.543,46.98 h2
  text "PF11" at 64.75,46.98 h2
  text "PG9" at 4.425,44.44 h2
  text "PG10" at 13.782,44.44 h2
  text "PF14" at 55.543,44.44 h2
  text "PF13" at 64.75,44.44 h2
  text "PD7" at 4.425,41.9 h2
  text "PD6" at 13.133,41.9 h2
  text "PG0" at 55.543,41.9 h2
  text "PF15" at 64.75,41.9 h2
  text "PD5" at 4.425,39.36 h2
  text "PD4" at 13.147,39.36 h2
  text "PE7" at 55.543,39.36 h2
  text "PG1" at 64.75,39.36 h2
  text "PD3" at 4.425,36.82 h2
  text "PD2" at 13.114,36.82 h2
  text "PE9" at 55.543,36.82 h2
  text "PE8" at 64.75,36.82 h2
  text "PD1" at 4.425,34.28 h2
  text "PD0" at 13.14,34.28 h2
  text "PE11" at 55.543,34.28 h2
  text "PE10" at 64.75,34.28 h2
  text "PC12" at 4.425,31.74 h2
  text "PC11" at 13.64,31.74 h2
  text "PE13" at 55.543,31.74 h2
  text "PE12" at 64.75,31.74 h2
  text "PC10" at 4.425,29.2 h2
  text "PA15" at 13.689,29.2 h2
  text "PE15" at 55.543,29.2 h2
  text "PE14" at 64.75,29.2 h2
  text "K" at 18.4,28.1 h7
  text "I" at 49.814,27.29 h7.62
  text "PA14" at 4.425,26.66 h2
  text "PA13" at 13.687,26.66 h2
  text "PB11" at 55.543,26.66 h2
  text "PB10" at 64.75,26.66 h2
  text "PA12" at 4.425,24.12 h2
  text "PA11" at 13.695,24.12 h2
  text "PB13" at 55.543,24.12 h2
  text "PB12" at 64.75,24.12 h2
  text "F" at 18.2,22.1 h7
  text "PA10" at 4.425,21.58 h2
  text "PA9" at 13.075,21.58 h2
  text "PB15" at 55.543,21.58 h2
  text "PB14" at 64.75,21.58 h2
  text "PA8" at 4.425,19.04 h2
  text "PC9" at 13.02,19.04 h2
  text "PD9" at 55.543,19.04 h2
  text "PD8" at 64.75,19.04 h2
  text "G" at 19.4,16.9 h7
  text "PC8" at 4.425,16.5 h2
  text "PC7" at 13.027,16.5 h2
  text "PD11" at 55.543,16.5 h2
  text "PD10" at 64.75,16.5 h2
  text "PC6" at 4.425,13.96 h2
  text "PG8" at 13.151,13.96 h2
  text "PD13" at 55.543,13.96 h2
  text "PD12" at 64.75,13.96 h2
  text "E" at 48,12.5 h7
  text "PG7" at 4.425,11.42 h2
  text "PG6" at 13.153,11.42 h2
  text "PD15" at 55.543,11.42 h2
  text "PD14" at 64.75,11.42 h2
  text "C" at 19.3,11.2 h7
  text "PG5" at 4.425,8.88 h2
  text "PG3" at 55.543,8.88 h2
  text "PG2" at 64.75,8.88 h2
  text "PG4" at 13.167,8.563 h2
  text "GND" at 4.425,6.34 h2
  text "GND" at 64.75,6.34 h2
  text "H" at 19.5,6 h7
  text "GND" at 55.527,5.309 h2
  text "GND" at 12.986,4.753 h2
  text "USB USER" at 25.977,1.709 h2 r270
  text "OC" at 51.327,1.509 h1.5 r270
  text "VBUS" at 41.177,0.509 h2 r270
  text "SILKSCREEN BOTTOM LAYER" at -20,-69.5 h2.45
Top Paste:
  text "PASTE MASK TOP LAYER" at -20,-69.5 h2.45
Bot Paste:
  text "PASTE MASK BOTTOM LAYER" at -20,-69.5 h2.45
M1-Board Shape:
  the board outline again, w0.127
M2-Board Dimensions:
Top Assy:
  text "ASSEMBLY TOP LAYER" at -20,-69.5 h2.45
Top Mask:
  text "SOLDER MASK TOP LAYER" at -20,-69.5 h2.45
MECH16:
  lines w0.203: 46.335,95.005 46.335,110.245 66.655,110.245 66.655,95.005 46.335,95.005
Z:
  lines w0.203: 59.035,97.545 59.035,107.705 64.115,107.705 64.115,97.545 59.035,97.545 ; 59.67,98.815 cw(c60.305,98.815) 60.94,98.815 cw(c60.305,98.815) 59.67,98.815 ; 59.67,101.355 cw(c60.305,101.355) 60.94,101.355 cw(c60.305,101.355) 59.67,101.355 ; 59.67,103.895 cw(c60.305,103.895) 60.94,103.895 cw(c60.305,103.895) 59.67,103.895 ; 59.67,106.435 cw(c60.305,106.435) 60.94,106.435 cw(c60.305,106.435) 59.67,106.435 ; 62.21,98.815 cw(c62.845,98.815) 63.48,98.815 cw(c62.845,98.815) 62.21,98.815 ; 62.21,101.355 cw(c62.845,101.355) 63.48,101.355 cw(c62.845,101.355) 62.21,101.355 ; 62.21,103.895 cw(c62.845,103.895) 63.48,103.895 cw(c62.845,103.895) 62.21,103.895 ; 62.21,106.435 cw(c62.845,106.435) 63.48,106.435 cw(c62.845,106.435) 62.21,106.435 ; 66.655,95.005 76.815,95.005 76.815,110.245 66.655,110.245 66.655,95.005
  text "7" at 59.67,109.61 h1.2 r270
  text "8" at 62.21,109.61 h1.2 r270
  text "1" at 59.67,96.91 h1.2 r270
  text "2" at 62.21,96.91 h1.2 r270
  text "MECHANICAL DRAWING" at -20,-69.5 h2.45
Bot Assy:
  lines w0.203: 5.06,5.47 10.14,5.47 10.14,86.75 5.06,86.75 5.06,5.47 ; 55.86,5.47 60.94,5.47 60.94,86.75 55.86,86.75 55.86,5.47
  text "SN" at 60.87,97.613 h1.05 r270
  text "RoHS" at 54.899,94.75 h1.05
  text "P1" at 8.5,45.5 h1.5
  text "P2" at 59.5,44 h1.5
  text "ASSEMBLY BOTTOM LAYER" at 85,-69.5 h2.45
Bot Mask:
  text "SOLDER MASK BOTTOM LAYER" at -20,-69.5 h2.45
User Attributes:
  lines w0.254: 23.475,36.077 32.365,36.077 ; 26.079,29.791 32.365,36.077 ; 26.079,42.363 32.365,36.077 ; 38.651,29.791 32.365,36.077 ; 38.651,42.363 32.365,36.077 ; 41.255,36.077 32.365,36.077 ; 32.365,27.187 cw(c32.365,36.077) 32.365,44.967 ; 32.365,27.187 ccw(c32.365,36.077) 32.365,44.967 ; 32.365,27.187 32.365,36.077 ; 32.365,36.077 32.365,44.967 ; 32.365,30.997 cw(c32.365,36.077) 32.365,41.157 cw(c32.365,36.077) 32.365,30.997
PERCAGES:
  text "DRILL DRAWING" at -20,-69.5 h2.45
CARTOUCHE F1:
  region: 101.58,-83.43 107.41,-83.427 107.676,-82.897 105.39,-80.611 105.085,-79.925 105.085,-79.087 105.161,-78.782 105.466,-78.248 105.771,-77.944 106.152,-77.715 106.609,-77.563 107.143,-77.486 117.963,-77.486 117.353,-79.087 117.277,-79.163 114.763,-79.163 112.324,-84.954 110.572,-84.954 112.934,-79.391 112.934,-79.163 106.914,-79.163 106.762,-79.239 106.685,-79.391 106.685,-79.62 106.762,-79.696 108.971,-81.83 109.2,-82.211 109.276,-82.592 109.352,-82.668 109.352,-83.354 cw(c107.079,-82.887) 108.133,-84.954 100.97,-84.954 100.97,-84.802 101.504,-83.506
  lines w0.203: -21.293,-92.855 87.927,-92.855 ; -21.293,-83.965 87.927,-83.965 ; 100.97,-84.954 101.123,-85.106 113.696,-85.106 ccw(c113.131,-82.643) 115.372,-83.811 118.42,-76.496 118.42,-76.191 118.344,-76.115 105.695,-76.115 ccw(c106.188,-78.486) 104.018,-77.41 100.97,-84.802 100.97,-84.954
  lines w0.508: -58.123,-100.475 -58.123,-59.835 132.377,-59.835 ; -55.583,-85.235 -25.103,-85.235 ; -55.583,-73.805 -25.103,-73.805 ; -67.623,-100.475 -67.623,186.525 132.377,186.525 132.377,-100.475 -67.623,-100.475 ; -55.583,-97.935 -25.103,-97.935 -25.103,-62.375 -55.583,-62.375 -55.583,-97.935 ; -22.563,-97.935 -22.563,-75.075 89.197,-75.075 89.197,-97.935 -22.563,-97.935 ; -22.563,-72.535 89.197,-72.535 89.197,-62.375 -22.563,-62.375 -22.563,-72.535 ; 91.737,-97.935 129.837,-97.935 129.837,-62.375 91.737,-62.375 91.737,-97.935
  text "DATE:" at -54,-67.5 h1.78
  text "30/04/2013" at -54,-71.5 h1.78
  text "STM32F429-discovery" at -20.123,-82.975 h2.45
  text "MB1075E" at -20.523,-92.375 h2.45
  text "S.M.E.E." at -52.09,-94.86 h4.2
CARTOUCHE FX:
  region: -36.826,-83.43 -42.657,-83.427 -42.922,-82.897 -40.636,-80.611 -40.332,-79.925 -40.332,-79.087 -40.408,-78.782 -40.713,-78.248 -41.017,-77.944 -41.398,-77.715 -41.856,-77.563 -42.389,-77.486 -53.209,-77.486 -52.6,-79.087 -52.524,-79.163 -50.009,-79.163 -47.571,-84.954 -45.818,-84.954 -48.18,-79.391 -48.18,-79.163 -42.16,-79.163 -42.008,-79.239 -41.932,-79.391 -41.932,-79.62 -42.008,-79.696 -44.218,-81.83 -44.446,-82.211 -44.523,-82.592 -44.599,-82.668 -44.599,-83.354 ccw(c-42.326,-82.887) -43.38,-84.954 -36.217,-84.954 -36.217,-84.802 -36.75,-83.506
  lines w0.203: -23.173,-92.855 86.047,-92.855 ; -23.173,-83.965 86.047,-83.965 ; -53.667,-76.496 -53.667,-76.191 -53.59,-76.115 -40.941,-76.115 cw(c-41.435,-78.486) -39.265,-77.41 -36.217,-84.802 -36.217,-84.954 -36.369,-85.106 -48.942,-85.106 cw(c-48.377,-82.643) -50.619,-83.811 -53.667,-76.496
  lines w0.508: -67.623,-59.835 122.877,-59.835 122.877,-100.475 ; 89.857,-85.235 120.337,-85.235 ; 89.857,-73.805 120.337,-73.805 ; -67.623,-100.475 132.377,-100.475 132.377,186.525 -67.623,186.525 -67.623,-100.475 ; -65.083,-97.935 -65.083,-62.375 -26.983,-62.375 -26.983,-97.935 -65.083,-97.935 ; -24.443,-97.935 87.317,-97.935 87.317,-75.075 -24.443,-75.075 -24.443,-97.935 ; -24.443,-72.535 -24.443,-62.375 87.317,-62.375 87.317,-72.535 -24.443,-72.535 ; 89.857,-97.935 120.337,-97.935 120.337,-62.375 89.857,-62.375 89.857,-97.935
  text "DATE:" at 118.754,-67.5 h1.78
  text "30/04/2013" at 118.754,-71.5 h1.78
  text "STM32F429-discovery" at 84.877,-82.975 h2.45
  text "MB1075E" at 84.877,-91.975 h2.45
  text "S.M.E.E." at 116.844,-94.86 h4.2
Drill Drawing:
  circle w0.254: c-64.908,173.444 r0.921
  circle w0.254: c-64.908,152.727 r0.552
  circle w0.254: c-64.908,152.727 r0.921
  lines w0.254: -65.829,139.836 -65.368,139.836 -65.368,139.376 -64.447,139.376 -64.447,139.836 -63.987,139.836 -63.987,140.757 -64.447,140.757 -64.447,141.217 -65.368,141.217 -65.368,140.757 -65.829,140.757 -65.829,139.836 ; -65.829,143.519 -63.987,143.519 -63.987,145.361 -65.829,145.361 -65.829,143.519 ; -65.829,147.663 -63.987,147.663 -63.987,149.504 -65.829,149.504 -65.829,147.663 ; -65.829,156.87 -64.908,155.95 -63.987,156.87 -64.908,157.791 -65.829,156.87 ; -65.829,160.093 -65.829,160.553 -65.368,161.014 -65.829,161.474 -65.829,161.935 -65.368,161.935 -64.908,161.474 -64.447,161.935 -63.987,161.935 -63.987,161.474 -64.447,161.014 -63.987,160.553 -63.987,160.093 -64.447,160.093 -64.908,160.553 -65.368,160.093 -65.829,160.093 ; -65.829,164.697 -65.368,164.697 -64.908,164.237 -64.447,164.697 -63.987,164.697 -64.447,165.157 -63.987,165.618 -64.447,165.618 -64.908,166.078 -65.368,165.618 -65.829,165.618 -65.368,165.157 -65.829,164.697 ; -65.829,170.222 -63.987,170.222 -64.908,168.38 -65.829,170.222 ; -65.46,148.031 -64.355,148.031 -64.355,149.136 -65.46,149.136 -65.46,148.031 ; -65.46,164.881 -65.184,164.881 -64.908,164.605 -64.632,164.881 -64.355,164.881 -64.632,165.157 -64.355,165.434 -64.632,165.434 -64.908,165.71 -65.184,165.434 -65.46,165.434 -65.184,165.157 -65.46,164.881 ; -65.46,169.853 -64.355,169.853 -64.908,168.748 -65.46,169.853
  lines w0.3: -67.473,138.133 13.771,138.133 ; -67.473,175.424 13.771,175.424 ; -55.096,133.989 -55.096,179.568 ; -41.654,133.989 -41.654,179.568 ; -17.101,133.989 -17.101,179.568 ; -7.401,133.989 -7.401,179.568 ; -67.473,133.989 13.771,133.989 13.771,179.568 -67.473,179.568 -67.473,133.989
  lines w0.381: -66.15,-53.17 -55.522,-53.17 -36.184,-53.17 -17.715,-53.17 -2.547,-53.17 ; -66.15,-48.09 -55.522,-48.09 -36.184,-48.09 -17.715,-48.09 -2.547,-48.09 ; -66.15,-43.01 -55.522,-43.01 -36.184,-43.01 -17.715,-43.01 -2.547,-43.01 ; -66.15,-37.93 -55.522,-37.93 -36.184,-37.93 -17.715,-37.93 -2.547,-37.93 ; -66.15,-32.85 -55.522,-32.85 -36.184,-32.85 -17.715,-32.85 -2.547,-32.85 ; -66.15,-27.77 -55.522,-27.77 -36.184,-27.77 -17.715,-27.77 -2.547,-27.77 ; -66.15,-22.69 -55.522,-22.69 -36.184,-22.69 -17.715,-22.69 -2.547,-22.69 ; -66.15,-17.61 -55.522,-17.61 -36.184,-17.61 -17.715,-17.61 -2.547,-17.61 ; -66.15,-12.53 -55.522,-12.53 -36.184,-12.53 -17.715,-12.53 -2.547,-12.53 ; -66.15,-7.45 -55.522,-7.45 -36.184,-7.45 -17.715,-7.45 -2.547,-7.45 ; -66.15,-2.37 -2.547,-2.37 ; -55.522,2.71 -55.522,-58.25 ; -36.184,2.71 -36.184,-58.25 ; -17.715,2.71 -17.715,-58.25 ; -55.522,-58.25 -36.184,-58.25 ; -55.522,-58.25 -66.15,-58.25 -66.15,2.71 -2.547,2.71 -2.547,-58.25 -17.715,-58.25 ; -36.184,-58.25 -17.715,-58.25
  text "Symbol" at -64.987,176.667 h3
  text "Hit Count" at -53.853,176.667 h3
  text "Finished Hole Size" at -40.411,176.667 h3
  text "Plated" at -15.858,176.667 h3
  text "Drill Layer Pair" at -6.158,176.667 h3
  text "500" at -53.853,172.524 h2.5
  text "0.30mm" at -40.411,172.524 h2.5
  text "PTH" at -15.858,172.524 h2.5
  text "TOP - Bottom" at -6.158,172.524 h2.5
  text "2" at -53.853,168.38 h2.5
  text "0.60mm" at -40.411,168.38 h2.5
  text "PTH" at -15.858,168.38 h2.5
  text "TOP - Bottom" at -6.158,168.38 h2.5
  text "2" at -53.853,164.237 h2.5
  text "0.65mm" at -40.411,164.237 h2.5
  text "PTH" at -15.858,164.237 h2.5
  text "TOP - Bottom" at -6.158,164.237 h2.5
  text "4" at -53.853,160.093 h2.5
  text "0.70mm" at -40.411,160.093 h2.5
  text "PTH" at -15.858,160.093 h2.5
  text "TOP - Bottom" at -6.158,160.093 h2.5
  text "2" at -53.853,155.95 h2.5
  text "0.85mm" at -40.411,155.95 h2.5
  text "NPTH" at -15.858,155.95 h2.5
  text "TOP - Bottom" at -6.158,155.95 h2.5
  text "6" at -53.853,151.806 h2.5
  text "0.90mm" at -40.411,151.806 h2.5
  text "PTH" at -15.858,151.806 h2.5
  text "TOP - Bottom" at -6.158,151.806 h2.5
  text "2" at -53.853,147.663 h2.5
  text "1.00mm" at -40.411,147.663 h2.5
  text "NPTH" at -15.858,147.663 h2.5
  text "TOP - Bottom" at -6.158,147.663 h2.5
  text "140" at -53.853,143.519 h2.5
  text "1.00mm" at -40.411,143.519 h2.5
  text "PTH" at -15.858,143.519 h2.5
  text "TOP - Bottom" at -6.158,143.519 h2.5
  text "2" at -53.853,139.376 h2.5
  text "1.20mm" at -40.411,139.376 h2.5
  text "NPTH" at -15.858,139.376 h2.5
  text "TOP - Bottom" at -6.158,139.376 h2.5
  text "660 Total" at -53.853,135.232 h2.5
  text "Slot definitions :" at -64.987,131.914 h2.5
  text "Routed Path Length" at -48.232,131.914 h2.5
  text "= Calculated from tool start centre position to tool end centre position." at -27.403,131.914 h2.5
  text "Hole Length" at -48.232,129.839 h2.5
  text "= Routed Path Length + Tool Size = Slot length as defined in the PCB layout" at -35.25,129.839 h2.5
  text "Layer" at -63.61,-1.1 h2.54
  text "Name" at -52.982,-1.1 h2.54
  text "Material" at -33.644,-1.1 h2.54
  text "Thickness" at -15.175,-1.1 h2.54
  text "Top Silk" at -52.982,-6.18 h2.54
  text "Top Solder" at -52.982,-11.26 h2.54
  text "Solder Resist" at -33.644,-11.26 h2.54
  text "0.010mm" at -15.175,-11.26 h2.54
  text "Cu base" at 0.05,-16.25 h2.54
  text "1" at -63.61,-16.34 h2.54
  text "TOP" at -52.982,-16.34 h2.54
  text "Copper" at -33.644,-16.34 h2.54
  text "0.012mm" at -15.175,-16.34 h2.54
  text "Dielectric 1" at -52.982,-21.42 h2.54
  text "FR-4" at -33.644,-21.42 h2.54
  text "0.127mm" at -15.175,-21.42 h2.54
  text "2" at -63.612,-26.5 h2.54
  text "L2" at -52.982,-26.5 h2.54
  text "Copper" at -33.644,-26.5 h2.54
  text "0.035mm" at -15.175,-26.5 h2.54
  text "Dielectric2" at -52.982,-31.58 h2.54
  text "FR-4" at -33.644,-31.58 h2.54
  text "1.200mm" at -15.175,-31.58 h2.54
  text "3" at -63.61,-36.66 h2.54
  text "L3" at -52.982,-36.66 h2.54
  text "Copper" at -33.644,-36.66 h2.54
  text "0.035mm" at -15.175,-36.66 h2.54
  text "Dielectric3" at -52.982,-41.74 h2.54
  text "FR-4" at -33.644,-41.74 h2.54
  text "0.127mm" at -15.175,-41.74 h2.54
  text "4" at -63.61,-46.82 h2.54
  text "Bottom" at -52.982,-46.82 h2.54
  text "Copper" at -33.644,-46.82 h2.54
  text "0.012mm" at -15.175,-46.82 h2.54
  text "Cu base" at 0.05,-46.85 h2.54
  text "Bottom Solder" at -52.982,-51.9 h2.54
  text "Solder Resist" at -33.644,-51.9 h2.54
  text "0.010mm" at -15.175,-51.9 h2.54
  text "Bot Silk" at -52.982,-56.98 h2.54

## Dimensions
0,119.3 to 6.33,115.96 on PERCAGES
6.33,6.74 to 59.67,6.74 on PERCAGES
0,119.3 to 6.33,85.48 on PERCAGES
59.67,115.96 to 66,119.3 on PERCAGES
59.67,6.74 to 66,0.39 on PERCAGES
59.67,85.48 to 66,119.3 on PERCAGES
8.87,6.74 to 6.33,6.74 on PERCAGES
57.13,6.74 to 59.67,6.74 on PERCAGES
59.67,85.48 to 59.67,113.42 on PERCAGES
6.33,6.74 to 0,0 on PERCAGES
66,119.3 to 66,0 on PERCAGES
0,119.3 to 66,119.3 on PERCAGES
6.33,113.42 to 6.33,85.48 on PERCAGES
59.67,85.48 to 59.67,6.74 on M2-Board Dimensions
59.67,6.74 to 66,0 on M2-Board Dimensions
66,119.3 to 59.67,85.48 on M2-Board Dimensions
66,119.3 to 66,0 on M2-Board Dimensions
6.33,85.48 to 6.33,6.74 on M2-Board Dimensions
6.33,6.74 to 0,0 on M2-Board Dimensions
59.67,115.96 to 66,119.3 on M2-Board Dimensions
59.67,6.74 to 6.33,6.74 on M2-Board Dimensions
59.67,85.48 to 59.67,113.42 on M2-Board Dimensions
59.67,115.96 to 66,119.3 on M2-Board Dimensions
6.33,85.48 to 6.33,95.64 on M2-Board Dimensions
6.33,85.48 to 0,119.3 on M2-Board Dimensions
6.33,115.96 to 0,119.3 on M2-Board Dimensions
6.33,115.96 to 0,119.3 on M2-Board Dimensions
6.33,113.42 to 6.33,108.34 on M2-Board Dimensions
6.33,115.96 to 59.67,115.96 on M2-Board Dimensions
-0.014,118.609 to 65.986,118.609 on M2-Board Dimensions
59.67,6.74 to 66,0 on M2-Board Dimensions
57.13,6.74 to 59.67,6.74 on M2-Board Dimensions
6.33,6.74 to 8.87,6.74 on M2-Board Dimensions
6.33,6.74 to 0,0 on M2-Board Dimensions

## Text inside footprints (layer, text, board x,y; h text height)
CN5: Top Silk "LCD 2.4\"" at 23.368,22.865 h5; CARTOUCHE FX "LCD 2.4\"" at 41.809,22.071 h5 r180; CARTOUCHE FX "48" at 17.209,47.671 h1.52 r180; CARTOUCHE FX "1" at 49.634,47.721 h1.52 r180
CN6: Bot Silk "1" at 29.245,4.485 h1.5; Z "PCB" at 39.245,0.085 h0.75; Z "EDGE" at 28.595,0.085 h0.75; CARTOUCHE FX "5" at 34.545,4.26 h1; CARTOUCHE FX "1" at 31.845,4.26 h1
HW1: PAD DOC FX "Sticker area" at 27.668,83.955 h0.75 r180
HW2: PAD DOC FX "Sticker area" at 60.145,97.853 h0.75 r270
U3: CARTOUCHE FX "16" at 50.215,72.55 h0.5; CARTOUCHE FX "13" at 52.165,72.55 h0.5; CARTOUCHE FX "12" at 53.39,71.65 h0.5 r90; CARTOUCHE FX "9" at 53.39,69.825 h0.5 r90; CARTOUCHE FX "8" at 52.29,68.925 h0.5; CARTOUCHE FX "5" at 50.34,68.925 h0.5; CARTOUCHE FX "4" at 49.44,70.025 h0.5 r270; CARTOUCHE FX "1" at 49.44,71.925 h0.5 r270
U9: Bot Silk "1" at 47.925,70.275 h1.3; CARTOUCHE FX "12" at 47.35,73 h0.6; CARTOUCHE FX "7" at 44.95,73.025 h0.6; CARTOUCHE FX "6" at 44.95,70.4 h0.6; CARTOUCHE FX "1" at 47.15,70.4 h0.6; CARTOUCHE FX "13" at 46.225,71.725 h0.6